# Altium PCB DZ_V5.1.PcbDoc (part 2 of 2)
Units mm, origin at the board's own origin, x right, y up, seen from the top; angles counter-clockwise.
Board outline 105.4 x 126 mm, 4 copper layers (Top Layer, TOP, Mid-Layer 1, INT1, Mid-Layer 2, INT2, Bottom Layer, Bottom); 225 components, 158 nets, 762 pads, 182 vias.
Unrouted connection lines stored in the file: 2.
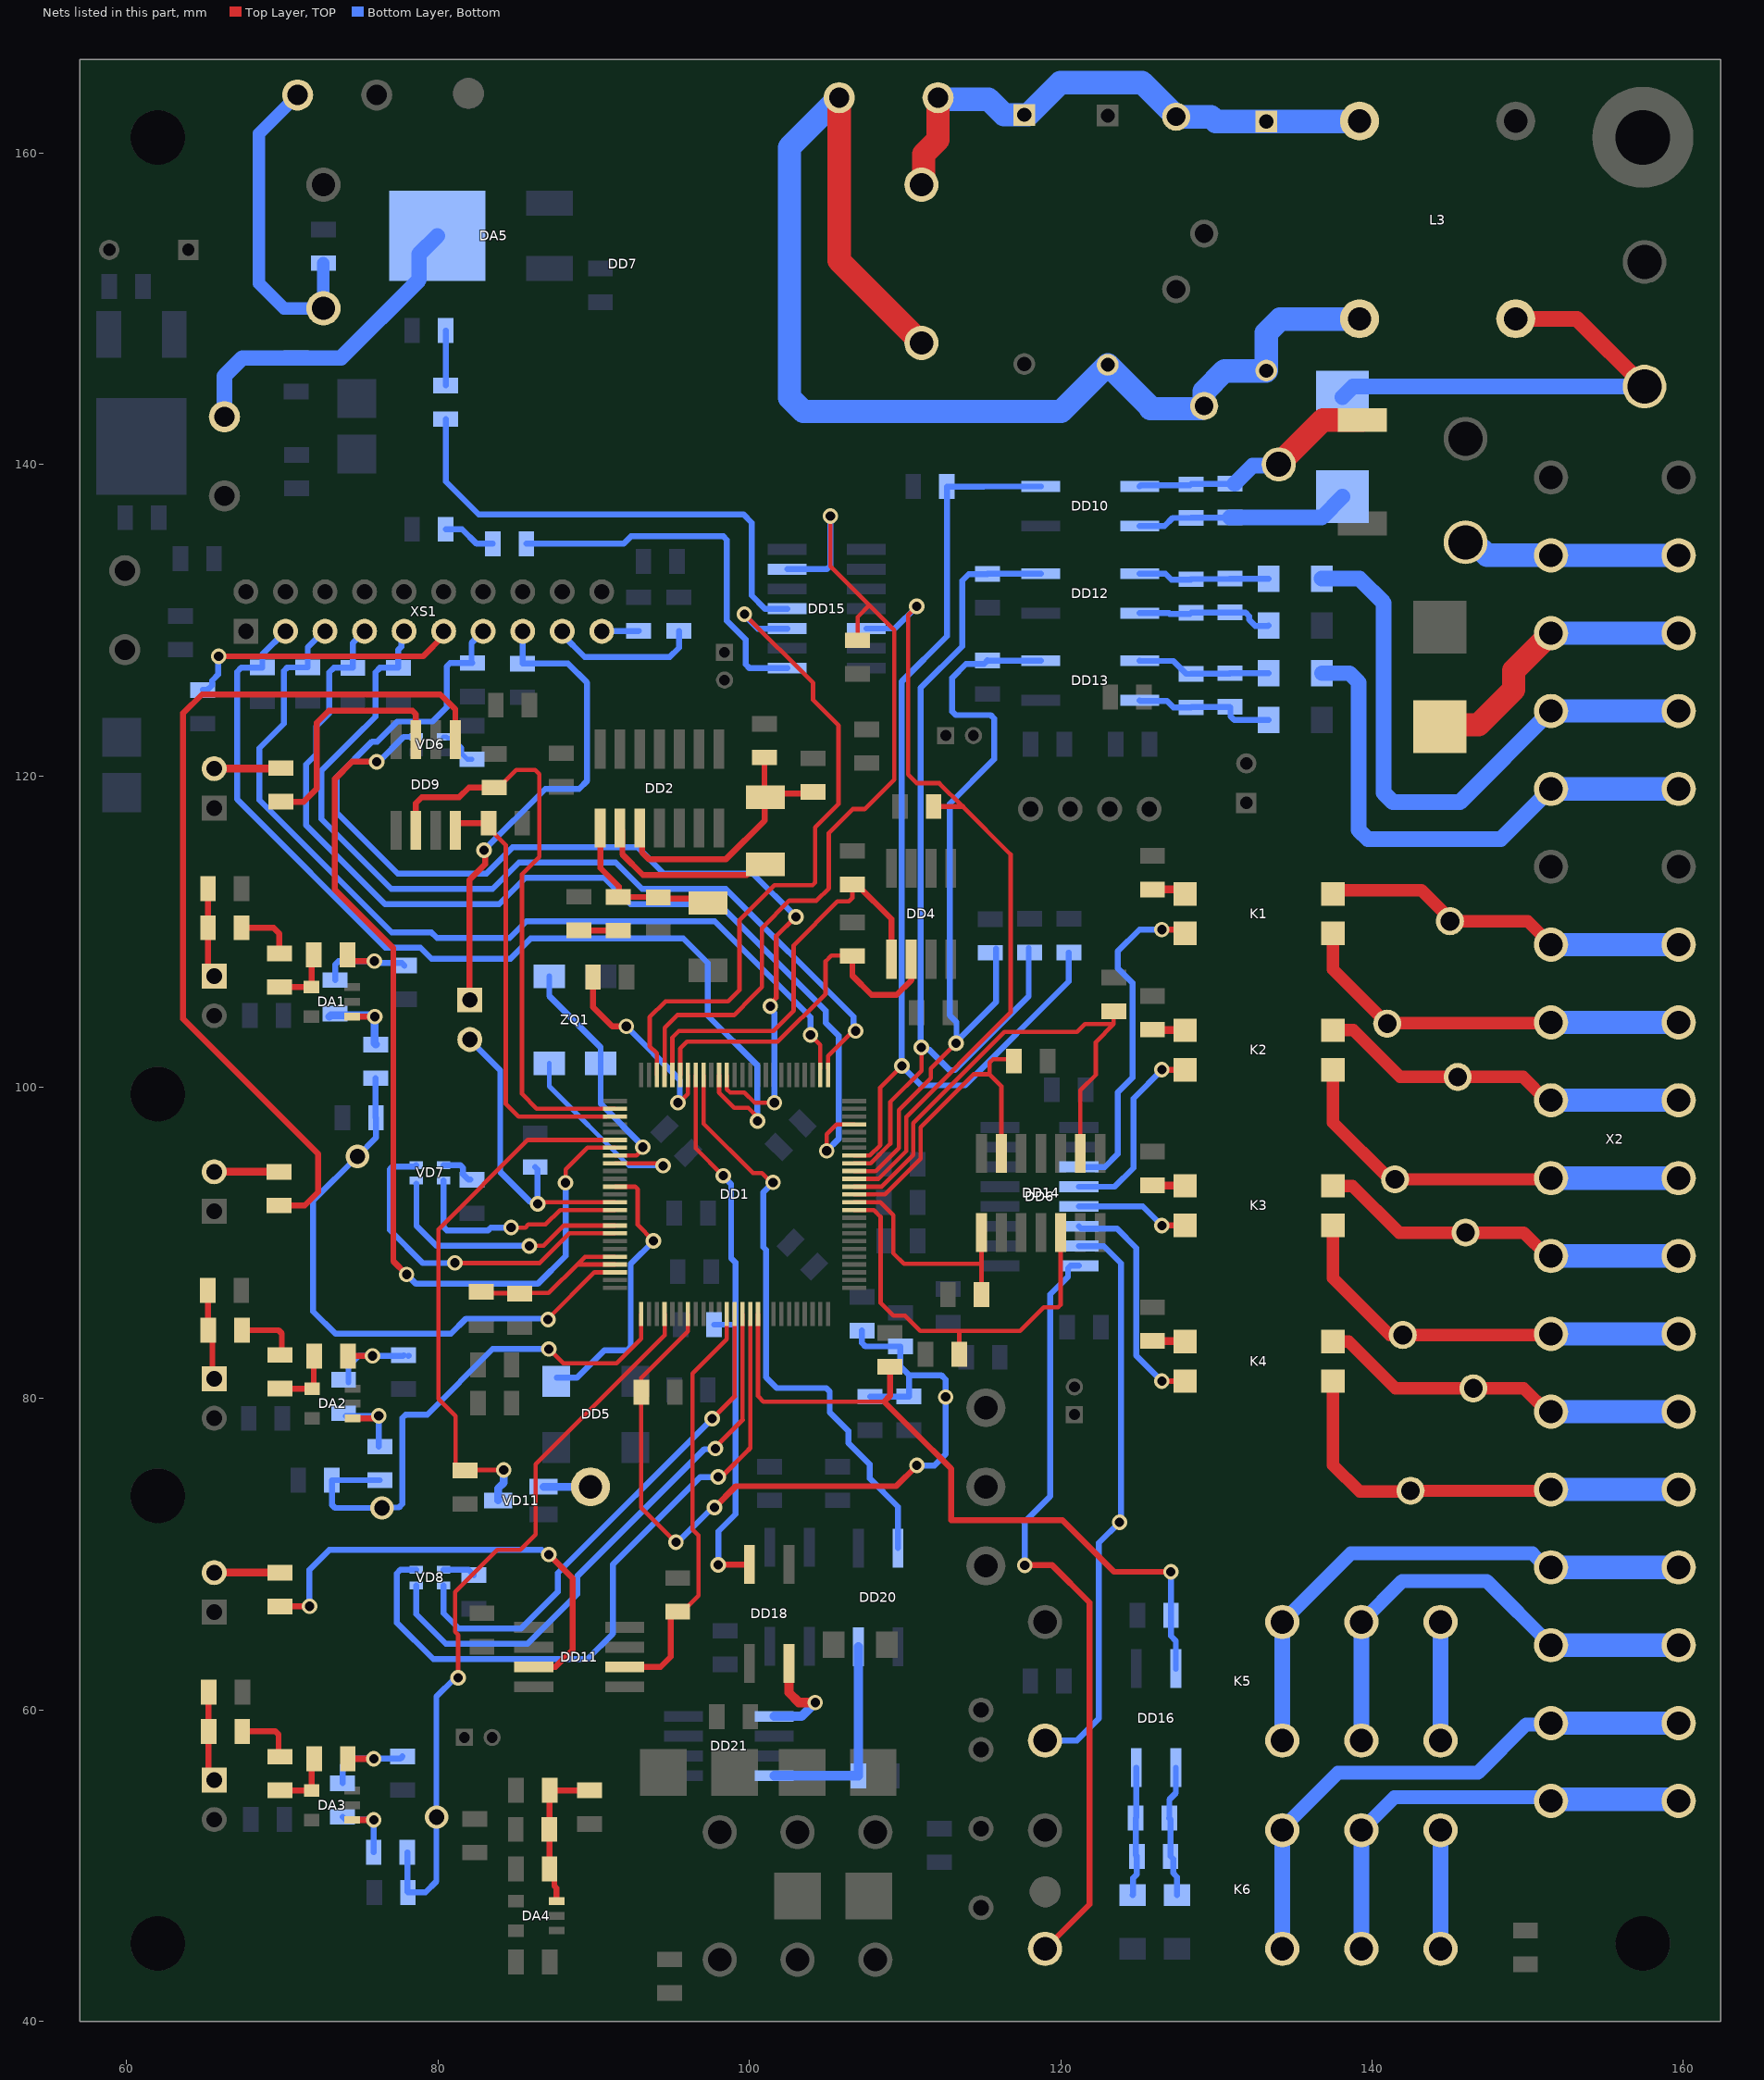
[diagram p4: the nets of this part, all layers, seen from the top]

## Via types
v1: diameter 1, hole 0.6, Top Layer, TOP to Bottom Layer, Bottom, tented both sides, 172 vias
v2: diameter 1.5, hole 1, Top Layer, TOP to Bottom Layer, Bottom, tented both sides, 7 vias
v3: diameter 1.6, hole 1, Top Layer, TOP to Bottom Layer, Bottom, 2 vias
v4: diameter 1.1, hole 0.7, Top Layer, TOP to Bottom Layer, Bottom, tented both sides, 1 vias

## Nets (pads, with @x,y where several pads share a name; then routed paths per layer and width w, separated by ;. In a path a pad name is that pad's centre, name@x,y a point inside that pad or via, vN(x,y) a via of type N, cw(c..) or ccw(c..) an arc to the next point about the centre after c; other vN are vias at no path point) (continued)
LED1.3: DD1.7 VD6.3 | length 60.6
  Top Layer, TOP w0.279: v1@88.202,93.859 88.202,94.721 89.506,96.025 89.592,96.111 DD1.7@91.37,96.111
  Top Layer, TOP w0.381: v1(76.053,120.898) 74.473,120.898 73.375,119.8 73.375,112.673 77.125,108.923 77.125,88.825 v1(77.975,87.975)
  Bottom Layer, Bottom w0.381: v1(76.053,120.898) 76.179,120.898 77.781,122.5 VD6.3@78.6,122.5 ; v1(77.975,87.975) 78.582,87.368 86.399,87.368 88.19,89.159 v1(88.19,93.859)
LED2.1: DD1.15 VD7.1 | length 14.6
  Top Layer, TOP w0.279: v1(84.69,90.984) 85.609,90.984 85.8,91.175 86.9,91.175 87.836,92.111 DD1.15@91.37,92.111
  Bottom Layer, Bottom w0.381: VD7.1@80.35,94 80.35,91.023 80.564,90.809 83.215,90.809 83.386,90.981 84.686,90.981 v1(84.69,90.984)
LED2.2: DD1.17 VD7.2 | length 16.5
  Top Layer, TOP w0.279: v1(85.865,89.809) 85.871,89.815 86.784,89.815 88.08,91.111 DD1.17@91.37,91.111
  Bottom Layer, Bottom w0.381: VD7.2@78.6,93.8 78.613,93.787 78.613,91.087 79.891,89.809 v1(85.865,89.809)
LED2.3: DD1.18 VD7.3 | length 21.9
  Top Layer, TOP w0.279: v1(81.073,88.718) 81.115,88.718 81.129,88.704 86.529,88.704 88.436,90.611 DD1.18@91.37,90.611
  Bottom Layer, Bottom w0.381: VD7.3@78.6,95 78.511,94.911 77.079,94.911 76.9,94.732 76.9,90.825 79.021,88.704 81.059,88.704 v1(81.073,88.718)
LED3.1: DD1.38 VD8.1 | length 32.6
  Top Layer, TOP w0.28: 99.05,80.144 DD1.38@99.05,85.006
  Top Layer, TOP w0.305: v1(97.615,78.709) 98.952,80.046 99.05,80.144
  Bottom Layer, Bottom w0.381: VD8.1@80.35,68 80.35,66.213 81.339,65.224 85.331,65.224 87.7,67.593 87.7,68.794 v1(97.615,78.709)
LED3.2: DD1.39 VD8.2 | length 37.1
  Top Layer, TOP w0.28: 99.55,78.619 DD1.39@99.55,85.431
  Top Layer, TOP w0.305: v1(97.819,76.792) 97.819,76.889 99.46,78.529 99.55,78.619
  Bottom Layer, Bottom w0.381: VD8.2@78.6,68 78.6,66.148 80.505,64.243 85.743,64.243 88.929,67.429 88.929,68.579 97.104,76.754 97.781,76.754 v1(97.819,76.792)
LED3.3: DD1.40 VD8.3 | length 44.6
  Top Layer, TOP w0.28: 100.05,76.819 DD1.40@100.05,85.006
  Top Layer, TOP w0.305: v1(97.985,74.97) 98.201,74.97 99.968,76.737 100.05,76.819
  Bottom Layer, Bottom w0.381: VD8.3@78.6,69 77.573,69 77.35,68.777 77.35,65.6 79.688,63.262 89.593,63.262 91.225,64.894 91.225,69.35 96.834,74.959 97.973,74.959 v1(97.985,74.97)
LED4: DD1.98 DD15.3 | length 44.3
  Top Layer, TOP w0.279: DD1.98@94.05,100.791 94.05,102.177 93.59,102.637 93.59,104.49 94.609,105.509 98.64,105.509 99.358,106.227 99.358,110.726 101.606,112.975 104.057,112.975 104.221,113.139 104.221,116.689 105.725,118.194 105.725,123.223 104.09,124.859 104.09,125.96 v1(99.675,130.375)
  Bottom Layer, Bottom w0.381: v1(99.675,130.375) 99.675,130.3 100.525,129.45 102.426,129.45 DD15.3@102.435,129.459
LED5: DD1.97 DD15.6 R90.1 | length 55.9
  Top Layer, TOP w0.279: DD1.97@94.55,100.791 94.55,103.819 94.908,104.177 95.36,104.629 99.004,104.629 100.237,105.863 100.237,105.872 100.8,106.435 100.8,110.218 102.563,111.981 104.307,111.981 105.1,112.774 105.1,116.325 106.634,117.859 107.395,117.859 109.298,119.761 109.298,129.351 107.699,130.949 ; v1(105.2,136.675) 105.2,133.448 107.699,130.949 ; R90.1@106.95,128.7 106.95,130.2 107.699,130.949
  Bottom Layer, Bottom w0.381: DD15.6@102.435,133.269 104.977,133.269 105.2,133.492 v1(105.2,136.675)
Led5_1: DD15.4 R82.1 | length 32.1
  Bottom Layer, Bottom w0.381: R82.1@80.49,142.909 80.49,138.901 82.616,136.775 99.625,136.775 100.15,136.25 100.15,131.575 100.996,130.729 DD15.4@102.435,130.729
LED_4_1_1: R81.1 VD9.1 | length 3.4
  Bottom Layer, Bottom w0.381: VD9.1@80.489,135.832 81.543,135.832 82.475,134.9 R81.1@83.516,134.9
LED_5_1_1: R82.2 VD10.1 | length 3.5
  Bottom Layer, Bottom w0.381: R82.2@80.489,145.068 VD10.1@80.489,148.6
NetBAT1_Plus: 
NetC1_1: R5.2 R6.1 | length 3.9
  Top Layer, TOP w0.381: R5.2@67.35,110.268 R5.2@67.379,110.239 69.43,110.239 69.8,109.869 R6.1@69.8,108.589
NetC3_2: C3.2 DD1.23 R7.2 | length 38.4
  Top Layer, TOP w0.279: v1(87.065,85.075) 87.065,85.134 90.042,88.111 DD1.23@91.37,88.111
  Bottom Layer, Bottom w0.381: R7.2@75.99,100.575 75.99,98.059 C3.2@76.015,98.034 76.015,96.759 74.815,95.56 71.975,92.719 71.975,85.598 73.409,84.165 80.82,84.165 81.789,85.134 87.006,85.134 v1(87.065,85.075)
  other v2: 74.825,95.55
NetC4_1: R12.2 R13.1 | length 4
  Top Layer, TOP w0.381: R12.2@67.4,84.389 69.75,84.389 69.96,84.179 R13.1@69.96,82.798
NetC6_2: C6.2 DD1.26 R14.2 | length 34.7
  Top Layer, TOP w0.279: v1(87.115,83.184) 88.04,82.259 91.459,82.259 93.05,83.85 DD1.26@93.05,85.431
  Bottom Layer, Bottom w0.381: R14.2@76.265,74.759 73.184,74.759 C6.2@73.175,74.75 73.175,73.181 73.381,72.975 v2(76.4,72.975) 76.43,73.005 77.477,73.005 77.7,73.228 77.7,78.752 77.923,78.975 79.3,78.975 83.509,83.184 v1(87.115,83.184)
NetC7_1: R19.2 R20.1 | length 3.8
  Top Layer, TOP w0.381: R19.2@67.764,58.629 69.545,58.629 69.754,58.42 R20.1@69.754,56.684
NetC9_2: C9.2 DD1.29 R21.2 | length 48.4
  Top Layer, TOP w0.279: v1(81.291,62.059) 81.291,64.816 81.09,65.017 81.09,67.578 83.795,70.284 85.29,70.284 86.265,71.259 86.265,75.783 94.55,84.068 DD1.29@94.55,85.431
  Bottom Layer, Bottom w0.381: R21.2@78.024,50.859 78.024,48.325 C9.2@78.065,48.284 79.185,48.284 79.89,48.988 79.89,53.125 79.89,60.859 81.09,62.059 v1(81.291,62.059)
  other v2: 79.9,53.125
NetC11_1: C11.1 C13.2 DA4.3 R22.2 R23.2 | length 9.9
  Top Layer, TOP w0.381: DA4.3@87.61,47.734 87.61,48.555 87.469,48.696 87.469,49.484 R23.2@87.16,49.794 87.154,49.799 87.154,52.328 C11.1@87.149,52.334 87.159,52.344 87.159,54.823 R22.2@87.17,54.834 C13.2@89.74,54.834
NetC16_1: C16.1 DD2.1 R26.2 VD5.1 | length 11.6
  Top Layer, TOP w0.381: DD2.1@90.411,116.634 90.425,116.62 90.425,114.073 91.614,112.884 91.614,112.266 C16.1@91.566,112.218 94.116,112.218 R26.2@94.141,112.193 94.232,112.102 VD5.1@98.165,112.102
NetC16_2: C16.2 R25.2 | length 2.5
  Top Layer, TOP w0.381: R25.2@89.039,110.075 89.055,110.059 C16.2@91.566,110.059
NetC17_2: C17.2 DD2.3 R24.1 VD4.2 | length 18
  Top Layer, TOP w0.381: DD2.3@92.951,116.634 93.111,116.474 93.111,115.072 93.533,114.65 98.5,114.65 100.975,117.125 100.975,118.587 VD4.2@101.014,118.627 ; VD4.2@100.964,118.677 R24.1@100.964,121.175 ; VD4.2@100.989,118.627 100.989,118.827 101.014,118.852 C17.2@104.047,118.852
NetC20_1: 
NetC26_2: C26.2 DD1.6 VD11.3 | length 34.7
  Top Layer, TOP w0.279: v1(84.215,75.409) 81.756,75.409 C26.2@81.74,75.393 81.485,75.393 81.125,75.753 81.125,78.875 80.025,79.975 80.025,90.869 85.767,96.611 DD1.6@91.37,96.611
  Bottom Layer, Bottom w0.5: VD11.3@83.85,73.45 83.85,74.225 84.215,74.59 v1(84.215,75.409)
NetC30_2: C30.2 DD1.21 DD1.22 R44.2 | length 12.3
  Top Layer, TOP w0.279: C30.2@82.465,86.734 82.499,86.768 84.939,86.768 84.965,86.743 84.999,86.777 87.102,86.777 88.962,88.638 ; DD1.22@91.37,88.611 88.989,88.611 88.962,88.638 ; DD1.21@91.37,89.111 89.436,89.111 88.962,88.638
NetC34_2: C34.2 DA5.Vout L1.1 | length 21
  Bottom Layer, Bottom w1: L1.1@66.275,143.055 66.275,145.675 67.434,146.834 C34.2@70.875,146.834 73.759,146.834 78.775,151.85 78.775,153.5 DA5.Vout@79.95,154.675
NetC37_2: C37.2 DD7.Vcc L2.1 | length 20.8
  Bottom Layer, Bottom w0.8: L2.1@70.975,163.725 68.5,161.25 68.5,151.625 70.102,150.023 DD7.Vcc@72.632,150.023 72.629,150.026 72.629,152.921 C37.2@72.625,152.925
NetC45_1: C45.1 DD10.2 R59.2 R101.2 | length 13.9
  Bottom Layer, Bottom w0.381: DD10.2@125.064,136.044 126.669,136.044 127.184,136.559 C45.1@128.364,136.559 128.385,136.579 130.844,136.579 R59.2@130.873,136.55 ; R59.2@130.864,136.6 R59.2@130.889,136.575
  Bottom Layer, Bottom w1: R59.2@130.864,136.6 136.775,136.6 R101.2@138.1,137.925
NetC45_2: C45.2 DD10.1 pad.7@134,140 R59.1 VD15.Catod | length 16.1
  Top Layer, TOP w1.5: pad.7@134,140 136.85,142.85 VD15.Catod@139.375,142.85
  Bottom Layer, Bottom w0.381: DD10.1@125.064,138.584 125.131,138.651 128.297,138.651 C45.2@128.364,138.718 128.385,138.738 130.844,138.738 R59.1@130.864,138.759 R59.1@131.164,138.759 ; pad.7@133.923,139.923 pad.7@134,140
  Bottom Layer, Bottom w1: R59.1@131.164,138.759 132.329,139.923 pad.7@133.923,139.923
NetC46_2: C46.1 DD1.68 DD10.3 R56.2 | length 67.9
  Top Layer, TOP w0.279: DD1.68@106.73,95.611 107.736,95.611 108.4,96.275 108.4,99.969 v1(109.79,101.359)
  Bottom Layer, Bottom w0.381: DD10.3@118.714,138.584 115.059,138.584 115.05,138.575 C46.1@112.684,138.575 112.684,128.959 109.79,126.065 v1(109.79,101.359) 111.029,100.119 113.852,100.119 120.515,106.782 R56.2@120.515,108.65
NetC47_1: C47.1 DD12.2 R65.2 R66.2 | length 8.8
  Bottom Layer, Bottom w0.381: DD12.2@125.064,130.444 126.956,130.444 127,130.4 128.306,130.4 C47.1@128.364,130.459 128.385,130.479 130.844,130.479 130.848,130.475 131.877,130.475 132.1,130.252 132.1,130.025 132.5,129.625 133.306,129.625 R66.2@133.339,129.659
NetC47_2: C47.2 DD12.1 R64.2 R65.1 | length 8.5
  Bottom Layer, Bottom w0.381: DD12.1@125.064,132.984 126.716,132.984 126.875,132.825 127.1,132.6 128.347,132.6 C47.2@128.364,132.618 128.385,132.638 130.844,132.638 R65.1@130.864,132.659 R64.2@133.339,132.659
NetC50_2: C50.1 DD1.67 DD12.3 R63.2 | length 58.7
  Top Layer, TOP w0.279: DD1.67@106.73,95.111 107.786,95.111 109.05,96.375 109.05,99.05 111.05,101.05 v1(111.05,102.55)
  Bottom Layer, Bottom w0.381: R63.2@117.94,108.925 117.94,105.84 113.2,101.1 112.85,101.1 111.518,102.432 111.168,102.432 v1(111.05,102.55) 111,102.6 111,125.65 113.665,128.315 113.665,132.54 114.084,132.959 C50.1@115.29,132.959 115.302,132.971 118.702,132.971 DD12.3@118.714,132.984
NetC51_1: C51.1 DD13.2 R69.2 R70.2 | length 9.2
  Bottom Layer, Bottom w0.381: DD13.2@125.064,124.844 125.108,124.8 126.825,124.8 127.225,124.4 128.348,124.4 C51.1@128.364,124.384 128.405,124.425 R69.2@130.864,124.425 130.9,124.389 130.9,123.825 131.141,123.584 R70.2@133.339,123.584
NetC51_2: C51.2 DD13.1 R68.2 R69.1 | length 8.6
  Bottom Layer, Bottom w0.381: DD13.1@125.064,127.384 125.073,127.375 127.232,127.375 128.064,126.543 C51.2@128.364,126.543 128.385,126.563 130.844,126.563 R69.1@130.864,126.584 R68.2@133.339,126.584
NetC52_2: C52.1 DD1.66 DD13.3 R67.2 | length 52.5
  Top Layer, TOP w0.279: DD1.66@106.73,94.611 108.111,94.611 109.6,96.1 109.6,98.53 111.65,100.58 111.65,101.197 v1(113.278,102.825) v1@113.278,102.75 ; v1@113.303,102.775 v1@113.531,102.775
  Bottom Layer, Bottom w0.3: v1(113.278,102.825) 113.278,102.903 v1@113.303,102.928
  Bottom Layer, Bottom w0.381: R67.2@115.84,108.9 115.84,105.465 113.303,102.928 113.303,104.171 112.865,104.609 112.865,118.209 115.725,121.069 115.725,123.677 115.502,123.9 113.253,123.9 113.03,124.123 113.03,126.293 113.918,127.181 115.061,127.181 C52.1@115.29,127.409 115.302,127.396 118.702,127.396 DD13.3@118.714,127.384
NetC54_2: R76.1 X3.1 XS1.15 | length 31.6
  Top Layer, TOP w0.381: X3.1@82.015,105.599 82.015,113.315 83.015,114.315 83.015,115.162 v1(82.954,115.223)
  Bottom Layer, Bottom w0.381: v1(82.954,115.223) 86.881,119.15 89.05,119.15 89.575,119.675 89.575,125.975 88.35,127.2 R76.1@85.425,127.2 85.435,127.21 XS1.15@85.435,129.281
NetDA1_1: DA1.1 R1.2 R7.1 | length 6.3
  Top Layer, TOP w0.3: DA1.1@74.47,104.539 DA1.1@74.48,104.529
  Top Layer, TOP w0.381: DA1.1@74.48,104.529 74.485,104.534 75.921,104.534 v1(75.926,104.529)
  Bottom Layer, Bottom w0.5: R1.2@73.015,104.529 73.11,104.624 75.831,104.624 v1(75.926,104.529) ; R7.1@75.99,102.734 R7.1@76,102.744
  Bottom Layer, Bottom w0.508: v1(75.926,104.529) 75.926,102.817 R7.1@76,102.744
NetDA1_4: DA1.4 R4.1 R6.2 | length 4.1
  Top Layer, TOP w0.381: R6.2@69.83,106.43 69.839,106.439 DA1.4@71.87,106.439 R4.1@71.87,108.509
NetDA2_1: DA2.1 R8.2 R14.1 | length 5.8
  Top Layer, TOP w0.381: DA2.1@74.51,78.729 75.857,78.729 76.025,78.896 v1(76.187,78.896)
  Bottom Layer, Bottom w0.381: R8.2@74.085,78.884 76.19,78.884 R14.1@76.19,76.918
NetDA2_4: DA2.4 R11.1 R13.2 | length 4.2
  Top Layer, TOP w0.381: R13.2@69.96,80.629 R13.2@69.97,80.629 ; R13.2@69.96,80.639 R13.2@69.97,80.629 ; R11.1@72.01,82.719 72.01,80.629 R13.2@69.97,80.629
NetDA3_1: DA3.1 R15.2 R21.1 | length 5.6
  Top Layer, TOP w0.4: DA3.1@74.475,52.939 v1@75.855,52.939
  Top Layer, TOP w0.5: v1@75.855,52.939 v1(75.865,52.949)
  Bottom Layer, Bottom w0.381: R15.2@73.865,53.134 74.05,52.949 v1(75.865,52.949) R21.1@75.865,50.859
NetDA3_4: DA3.4 R18.1 R20.2 | length 4.1
  Top Layer, TOP w0.381: R20.2@69.835,54.839 DA3.4@71.875,54.839 R18.1@71.875,56.869
NetDD1_2: DD1.2 DD9.2 R54.2 | length 38.1
  Top Layer, TOP w0.279: R54.2@83.6,119.25 83.9,119.25 85.025,120.375 86.225,120.375 86.5,120.1 86.5,114.794 85.39,113.684 85.39,99.559 86.337,98.611 DD1.2@91.37,98.611
  Top Layer, TOP w0.381: DD9.2@78.569,116.492 78.569,118.239 78.956,118.625 81.35,118.625 81.975,119.25 R54.2@83.6,119.25
NetDD1_3: DD1.3 DD9.4 R58.2 | length 27.8
  Top Layer, TOP w0.279: R58.2@83.24,116.959 83.24,116.659 84.344,115.554 84.344,98.933 85.16,98.118 DD1.3@90.824,98.118
  Top Layer, TOP w0.381: DD9.4@81.109,116.492 81.109,116.761 81.307,116.959 R58.2@83.24,116.959
NetDD1_14: C14.2 DD1.14 X3.2 | length 20
  Top Layer, TOP w0.279: v1(86.39,92.509) 86.492,92.611 DD1.14@91.37,92.611
  Bottom Layer, Bottom w0.381: X3.2@82.015,103.059 83.99,101.084 83.99,94.56 85.923,92.627 86.271,92.627 v1(86.39,92.509) 86.39,94.712 C14.2@86.233,94.869
NetDD1_37: DD1.37 DD11.2 R62.2 | length 26.9
  Top Layer, TOP w0.279: R62.2@95.39,66.316 95.69,66.316 96.729,67.356 96.729,71.221 96.35,71.6 96.35,81.619 96.59,81.859 98.444,83.713 98.55,83.819 DD1.37@98.55,85.006
  Top Layer, TOP w0.381: DD11.2@91.99,62.764 94.289,62.764 94.944,63.419 94.944,66.007 95.254,66.316 R62.2@95.39,66.316
NetDD1_61: DD1.61 DD14.12 R34.1 | length 26.6
  Top Layer, TOP w0.279: DD1.61@106.73,92.111 107.989,92.111 108.425,91.675 108.425,86.15 109.25,85.325 110,85.325 110.971,84.354 113.525,84.354 ; R34.1@113.475,82.85 113.475,84.304 113.525,84.354 ; DD14.12@119.99,90.659 119.99,86.025 119.826,85.862 118.903,85.862 117.395,84.354 113.525,84.354
NetDD1_62: DD1.62 DD14.8 R33.1 | length 15.2
  Top Layer, TOP w0.279: DD1.62@106.73,92.611 108.414,92.611 109.25,91.775 109.25,89.325 109.925,88.65 114.909,88.65 ; R33.1@114.909,86.675 114.909,88.65 ; DD14.8@114.91,90.659 114.91,89.035 114.909,88.65
NetDD1_63: DD1.63 DD14.6 R89.2 | length 20.9
  Top Layer, TOP w0.279: DD1.63@106.73,93.111 108.661,93.111 ; 108.701,93.111 111,95.41 111,97.425 114.4,100.825 115.425,100.825 ; DD14.6@116.18,95.739 116.18,100.07 115.425,100.825 ; R89.2@116.991,101.675 116.866,101.8 115.65,101.8 115.425,101.575 115.425,100.825
NetDD1_64: DD1.64 DD14.2 R88.2 | length 32.2
  Top Layer, TOP w0.279: DD1.64@106.73,93.611 108.487,93.611 110.525,95.649 110.525,97.7 116.375,103.55 121.05,103.55 121.55,104.05 123.4,104.05 ; DD14.2@121.26,95.739 121.26,99.81 122.25,100.8 122.25,102.9 123.4,104.05 ; R88.2@123.4,104.875 123.4,104.05
NetDD1_65: DD1.65 DD15.12 R41.1 | length 51.3
  Top Layer, TOP w0.279: DD1.65@106.73,94.111 108.29,94.111 110.075,95.896 110.075,98.093 116.775,104.793 116.775,114.95 113.7,118.025 112.2,119.525 110.75,119.525 110.2,120.075 110.2,130.325 v1(110.75,130.875)
  Top Layer, TOP w0.305: R41.1@111.825,118.025 113.7,118.025
  Bottom Layer, Bottom w0.254: DD15.12@107.515,129.459 DD15.12@107.519,129.454
  Bottom Layer, Bottom w0.381: DD15.12@107.519,129.454 109.329,129.454 v1(110.75,130.875)
NetDD1_72: DD1.72 R72.1 XS1.7 | length 67.1
  Top Layer, TOP w0.279: v1(104.965,95.909) 104.965,96.975 105.6,97.611 DD1.72@106.73,97.611
  Bottom Layer, Bottom w0.381: R72.1@74.425,126.934 73.298,126.934 73.015,126.651 73.015,124.015 72.171,123.171 72.171,121.384 71.525,120.737 71.525,116.825 76.587,111.763 83.915,111.763 85.602,113.45 90.675,113.45 92.362,111.763 98.049,111.763 104.906,104.906 104.906,104.131 105.725,103.312 105.725,96.669 v1(104.965,95.909) ; R72.1@74.525,126.934 74.525,128.531 XS1.7@75.275,129.281
NetDD1_76: DD1.76 R71.1 XS1.9 | length 60
  Top Layer, TOP w0.279: DD1.76@105.048,101.166 105.048,101.992 106.665,103.609 v1(106.816,103.609)
  Bottom Layer, Bottom w0.381: XS1.9@77.815,129.281 77.634,129.1 77.634,128.284 77.44,128.09 R71.1@77.44,126.934 76.259,126.934 75.975,126.65 75.975,123.8 74.594,122.419 72.506,120.331 72.506,117.232 76.994,112.744 83.509,112.744 85.196,114.431 91.415,114.431 93.102,112.744 98.471,112.744 106.688,104.528 106.688,103.737 v1(106.816,103.609)
NetDD1_77: DD1.77 R73.1 XS1.5 | length 59
  Top Layer, TOP w0.279: v1(103.925,103.35) 104.55,102.725 DD1.77@104.55,101.172
  Bottom Layer, Bottom w0.381: XS1.5@72.735,129.281 72.656,129.281 71.625,128.25 R73.1@71.625,126.959 70.314,126.959 70.09,126.736 70.09,123.34 68.525,121.775 68.525,118.438 77.019,109.944 79.566,109.944 79.928,109.581 84.594,109.581 85.663,110.65 97.775,110.65 103.925,104.5 v1(103.925,103.35)
NetDD1_89: DD1.89 R78.2 XS1.13 | length 68.7
  Top Layer, TOP w0.279: DD1.89@98.55,100.791 98.55,99.876 98.765,99.661 99.68,99.661 100.341,99 v1(101.605,99)
  Top Layer, TOP w0.305: v1(101.34,105.209) 101.34,105.35 101.725,105.735 101.725,109.7 102.967,110.942 v1(102.993,110.942)
  Bottom Layer, Bottom w0.381: XS1.13@82.895,129.281 82.15,128.536 82.15,127.298 R78.2@82.204,127.244 80.773,127.244 80.55,127.021 80.55,124.4 79.631,123.481 77.375,123.481 76.093,122.199 75.761,122.199 73.487,119.925 73.487,117.638 77.4,113.725 83.103,113.725 84.79,115.412 92.821,115.412 94.508,113.725 100.21,113.725 v1(102.993,110.942) ; v1(101.34,105.209) 101.34,105.041 101.605,104.776 v1(101.605,99)
NetDD1_90: DD1.90 R74.1 XS1.3 | length 64.5
  Top Layer, TOP w0.279: DD1.90@98.05,100.791 98.05,99.65 99.026,98.674 99.924,98.674 100.515,98.084 v1(100.515,97.834)
  Bottom Layer, Bottom w0.381: XS1.3@70.195,129.281 68.712,127.798 68.712,126.962 R74.1@68.7,126.95 67.348,126.95 67.084,126.686 67.084,118.491 76.613,108.963 78.863,108.963 79.575,108.25 84.65,108.25 85.95,109.55 95.75,109.55 97.325,107.975 97.325,104.583 100.515,101.393 v1(100.515,97.834)
NetDD1_94: DD1.94 R35.2 | length 13.1
  Top Layer, TOP w0.279: v1@95.444,98.956 96.05,99.561 DD1.94@96.05,100.791
  Top Layer, TOP w0.381: R35.2@89.955,107.084 89.955,105.143 91.19,103.909 v1(92.09,103.909)
  Bottom Layer, Bottom w0.381: v1(92.09,103.909) 95.525,100.473 v1@95.525,98.925
  other v1: 95.4,99
NetDD2_2: DD2.2 VD4.1 | length 11.8
  Top Layer, TOP w0.381: DD2.2@91.681,116.634 91.841,116.474 91.841,114.955 93.171,113.625 99.831,113.625 100.514,114.309 VD4.1@101.014,114.309
NetDD7_LINE: C62.1 C64.1 DD7.LINE L3.1 R85.1 R99.2 | length 35.5
  Top Layer, TOP w1.5: DD7.LINE@111.05,157.96 111.184,158.094 111.184,159.923 112.114,160.852 R85.1@112.114,163.55
  Bottom Layer, Bottom w1.5: R85.1@112.114,163.55 112.209,163.454 115.345,163.454 116.349,162.45 117.905,162.45 119.978,164.523 125.214,164.523 R99.2@127.412,162.325 129.65,162.325 129.95,162.025 C62.1@133.206,162.025 139.167,162.025 L3.1@139.192,162.05
NetDD7_NEUTRAL: C62.2 C63.2 DD7.NEUTRAL L3.2 R85.2 R86.1 | length 82.5
  Top Layer, TOP w1.5: 105.764,153.086 R85.2@105.764,163.55 ; 105.788,153.063 DD7.NEUTRAL@111.05,147.8
  Bottom Layer, Bottom w1.5: R85.2@105.764,163.55 102.575,160.361 102.575,144.279 103.454,143.4 120.019,143.4 C63.2@123.017,146.398 125.75,143.665 125.75,143.575 129.037,143.575 R86.1@129.212,143.75 129.212,144.687 130.525,146 133.183,146 C62.2@133.206,146.023 133.206,148.446 134.085,149.325 139.167,149.325 L3.2@139.192,149.35 ; DD7.NEUTRAL@111.05,147.8 DD7.NEUTRAL@111.184,147.666
NetDD9_5: DD9.5 R53.1 | length 57.5
  Top Layer, TOP w0.381: R53.1@69.79,92.4 71.431,92.4 72.29,93.259 72.29,95.719 63.625,104.384 63.625,124.027 64.823,125.225 80.148,125.225 81.09,124.284 81.109,124.264 DD9.5@81.109,122.334
NetDD9_7: DD9.7 R55.1 | length 15.3
  Top Layer, TOP w0.381: R55.1@69.89,118.334 71.365,118.334 72.2,119.169 72.2,123.4 72.977,124.177 78.346,124.177 78.569,123.954 DD9.7@78.569,122.334
NetDD11_7: DD11.7 R61.1 | length 30
  Top Layer, TOP w0.381: R61.1@69.85,66.659 v1(71.74,66.659) ; DD11.7@86.148,62.764 87.533,62.764 88.64,63.87 88.64,68.459 v1(87.115,69.984)
  Bottom Layer, Bottom w0.381: v1(71.74,66.659) 71.74,69.009 73.006,70.275 86.656,70.275 86.947,69.984 v1(87.115,69.984)
NetDD15_3: DD15.1 R81.2 | length 24.4
  Bottom Layer, Bottom w0.381: R81.2@85.675,134.9 91.918,134.9 92.393,135.375 98.327,135.375 98.55,135.152 98.55,129.958 99.76,128.747 99.76,127.148 99.984,126.925 102.428,126.925 DD15.1@102.435,126.919
NetK1_1: K1.1 R45.2 | length 2.1
  Top Layer, TOP w0.3: K1.1@127.949,112.7 K1.1@127.99,112.659
  Top Layer, TOP w0.508: R45.2@125.89,112.7 K1.1@127.949,112.7
NetK1_3: K1.3 R46.2 X2.11 X2.29 | length 26.2
  Top Layer, TOP w0.3: R46.2@140.969,104.083 R46.2@141.008,104.121 ; X2.11@151.452,104.121 X2.11@151.49,104.159
  Top Layer, TOP w0.8: K1.3@137.49,110.119 137.49,107.563 R46.2@140.969,104.083 ; R46.2@141.008,104.121 X2.11@151.452,104.121
  Bottom Layer, Bottom w1.5: X2.11@151.49,104.159 X2.29@159.69,104.159
NetK1_4: K1.4 R46.1 X2.12 X2.30 | length 23.6
  Top Layer, TOP w0.8: K1.4@137.49,112.659 143.165,112.659 145.165,110.659 149.99,110.659 X2.12@151.49,109.159
  Bottom Layer, Bottom w1.5: X2.12@151.49,109.159 X2.30@159.69,109.159
NetK2_1: K2.1 R47.2 | length 2.1
  Top Layer, TOP w0.508: R47.2@125.91,103.679 K2.1@127.969,103.679
  Top Layer, TOP w0.8: R47.2@125.89,103.7 R47.2@125.91,103.679 ; K2.1@127.969,103.679 K2.1@127.99,103.659
NetK2_3: K2.3 R48.2 X2.9 X2.27 | length 27.1
  Top Layer, TOP w0.8: K2.3@137.49,101.119 137.49,97.727 141.134,94.083 X2.9@151.413,94.083
  Top Layer, TOP w1.5: X2.9@151.413,94.083 X2.9@151.49,94.159
  Bottom Layer, Bottom w1.5: X2.9@151.49,94.159 X2.27@159.69,94.159
NetK2_4: K2.4 R48.1 X2.10 X2.28 | length 24.1
  Top Layer, TOP w0.8: K2.4@137.49,103.659 138.79,103.659 141.79,100.659 145.165,100.659 149.69,100.659 151.19,99.159 X2.10@151.49,99.159
  Bottom Layer, Bottom w1.5: X2.10@151.49,99.159 X2.28@159.69,99.159
NetK3_1: K3.1 R49.2 | length 2.1
  Top Layer, TOP w0.508: R49.2@125.91,93.679 K3.1@127.969,93.679
  Top Layer, TOP w0.8: R49.2@125.89,93.7 R49.2@125.91,93.679 ; K3.1@127.969,93.679 K3.1@127.99,93.659
NetK3_3: K3.3 R50.2 X2.7 X2.25 | length 27.1
  Top Layer, TOP w0.8: K3.3@137.49,91.119 137.49,87.733 141.14,84.083 X2.7@151.413,84.083
  Top Layer, TOP w1.5: X2.7@151.413,84.083 X2.7@151.49,84.159
  Bottom Layer, Bottom w1.5: X2.7@151.49,84.159 X2.25@159.69,84.159
NetK3_4: K3.4 R50.1 X2.8 X2.26 | length 24.1
  Top Layer, TOP w0.8: K3.4@137.49,93.659 138.74,93.659 141.74,90.659 145.17,90.659 149.737,90.659 151.237,89.159 X2.8@151.49,89.159
  Bottom Layer, Bottom w1.5: X2.8@151.49,89.159 X2.26@159.69,89.159
NetK4_1: K4.1 R51.2 | length 2.1
  Top Layer, TOP w0.508: R51.2@125.91,83.679 K4.1@127.969,83.679
  Top Layer, TOP w0.8: R51.2@125.89,83.7 R51.2@125.91,83.679 ; K4.1@127.969,83.679 K4.1@127.99,83.659
NetK4_3: K4.3 R52.2 X2.5 X2.23 | length 28.4
  Top Layer, TOP w0.8: K4.3@137.49,81.119 137.49,75.734 139.198,74.025 142.412,74.025 R52.2@142.469,74.083 142.477,74.075 151.406,74.075 X2.5@151.49,74.159
  Bottom Layer, Bottom w1.5: X2.5@151.49,74.159 X2.23@159.69,74.159
NetK4_4: K4.4 R52.1 X2.6 X2.24 | length 24.1
  Top Layer, TOP w0.8: K4.4@137.49,83.659 138.49,83.659 141.49,80.659 144.99,80.659 149.737,80.659 151.237,79.159 X2.6@151.49,79.159
  Bottom Layer, Bottom w1.5: X2.6@151.49,79.159 X2.24@159.69,79.159
NetK5_3: K5.3 K5.6 X2.4 X2.22 | length 35.3
  Bottom Layer, Bottom w0.889: K5.3@134.23,65.654 138.626,70.05 150.304,70.05 X2.4@151.195,69.159
  Bottom Layer, Bottom w1: K5.6@134.23,58.034 K5.3@134.23,65.654 ; X2.4@151.195,69.159 X2.4@151.49,69.159
  Bottom Layer, Bottom w1.5: X2.4@151.49,69.159 X2.22@159.69,69.159
NetK5_4: K5.4 K5.7 X2.3 X2.21 | length 30.8
  Bottom Layer, Bottom w0.889: K5.7@139.31,65.654 141.931,68.275 147.373,68.275 X2.3@151.49,64.159
  Bottom Layer, Bottom w1: K5.4@139.31,58.034 K5.7@139.31,65.654
  Bottom Layer, Bottom w1.5: X2.3@151.49,64.159 X2.21@159.69,64.159
NetK5_5: K5.5 K5.8 | length 7.6
  Bottom Layer, Bottom w1: K5.8@144.39,58.034 K5.5@144.39,65.654
NetK6_3: K6.3 K6.6 X2.2 X2.20 | length 36
  Bottom Layer, Bottom w0.889: K6.3@134.23,52.399 137.806,55.975 146.8,55.975 149.898,59.073 X2.2@151.404,59.073
  Bottom Layer, Bottom w1: K6.6@134.23,44.659 K6.3@134.23,52.279 K6.3@134.23,52.399 ; X2.2@151.404,59.073 X2.2@151.49,59.159
  Bottom Layer, Bottom w1.499: X2.2@151.49,59.159 X2.20@159.69,59.159
NetK6_4: K6.4 K6.7 X2.1 X2.19 | length 29.1
  Bottom Layer, Bottom w0.889: K6.7@139.31,52.279 141.431,54.4 151.248,54.4 X2.1@151.49,54.159
  Bottom Layer, Bottom w1: K6.4@139.31,44.659 K6.7@139.31,52.279 ; X2.1@151.49,54.159 X2.1@151.591,54.26 ; X2.19@159.589,54.26 X2.19@159.69,54.159
  Bottom Layer, Bottom w1.499: X2.1@151.591,54.26 X2.19@159.589,54.26
NetK6_5: K6.5 K6.8 | length 7.6
  Bottom Layer, Bottom w1: K6.8@144.39,44.659 K6.5@144.39,52.279
NetOutSv1: C59.1 DD1.41 DD16.3 R32.1 | length 47.2
  Top Layer, TOP w0.28: DD1.41@100.55,85.431 100.55,80.15 100.9,79.8 108.65,79.8 ; 110.488,77.963 110.5,77.975
  Top Layer, TOP w0.381: R32.1@109.025,82.05 109.025,80.175 108.65,79.8 110.488,77.963 112.95,75.5 112.95,72.2 120.1,72.2 123.425,68.875 v1(127.075,68.875)
  Bottom Layer, Bottom w0.381: v1(127.075,68.875) C59.1@127.075,66.075 127.075,64.75 127.39,64.435 DD16.3@127.39,62.65
NetR1_1: R1.1 R3.2 R4.2 | length 7.5
  Top Layer, TOP w0.381: R4.2@74.189,108.499 74.588,108.1 v1(75.9,108.1)
  Bottom Layer, Bottom w0.381: R1.1@73.39,106.879 73.39,107.877 73.613,108.1 v1(75.9,108.1) 76.018,107.982 77.667,107.982 R3.2@77.84,107.809
NetR2_1: R2.1 R5.1 VD1.1 | length 5.8
  Top Layer, TOP w0.381: R2.1@65.216,112.75 65.216,110.243 R5.1@65.22,110.239 65.225,110.234 65.225,107.519 VD1.1@65.615,107.129
NetR8_1: R8.1 R10.2 R11.2 | length 6.5
  Top Layer, TOP w0.3: v1(75.795,82.739) v1@75.82,82.739
  Top Layer, TOP w0.381: R11.2@74.229,82.739 v1(75.795,82.739)
  Bottom Layer, Bottom w0.381: R8.1@74.24,81.05 74.24,82.079 74.9,82.739 v1(75.795,82.739) 77.745,82.739 R10.2@77.79,82.784 ; R10.2@78.095,82.739 R10.2@78.115,82.759
NetR9_1: R9.1 R12.1 VD2.1 | length 5.8
  Top Layer, TOP w0.381: R9.1@65.2,86.95 65.22,86.93 65.22,84.409 R12.1@65.241,84.389 65.5,84.129 65.5,81.393 VD2.1@65.615,81.279
NetR15_1: R15.1 R17.2 R18.2 | length 6.9
  Top Layer, TOP w0.4: R18.2@74.195,56.869 v1(75.865,56.869)
  Bottom Layer, Bottom w0.381: R15.1@73.865,55.293 73.865,56.434 74.3,56.869 v1(75.865,56.869) 77.566,56.869 R17.2@77.715,57.018
NetR16_1: R16.1 R19.1 VD3.1 | length 5.8
  Top Layer, TOP w0.381: R16.1@65.266,61.15 65.26,61.144 65.26,58.635 R19.1@65.255,58.629 65.255,55.859 VD3.1@65.615,55.499
NetR27_2: R27.2 VD6.4 | length 2.6
  Bottom Layer, Bottom w0.3: VD6.4@80.35,122.5 80.525,122.5 80.625,122.4 80.911,122.4 81.526,121.785 81.526,121.409 81.876,121.059 R27.2@82.171,121.059
NetR28_2: R28.2 VD7.4 | length 2.4
  Bottom Layer, Bottom w0.381: VD7.4@80.35,95 81.417,95 81.596,94.821 81.596,94.406 81.944,94.059 R28.2@82.071,94.059
NetR29_2: R29.2 VD8.4 | length 2.1
  Bottom Layer, Bottom w0.381: VD8.4@80.35,69 81.956,69 R29.2@82.298,68.659
NetR57_1: R100.1 X2.16 X2.34 | length 18.5
  Top Layer, TOP w1.5: R100.1@144.35,123.15 144.475,123.275 146.825,123.275 149.09,125.54 149.09,126.76 X2.16@151.49,129.159
  Bottom Layer, Bottom w1.5: X2.16@151.49,129.159 X2.34@159.69,129.159
NetR64_1: R64.1 X2.15 X2.33 | length 38.4
  Bottom Layer, Bottom w1.016: R64.1@136.768,132.659 139.191,132.659 140.75,131.1 140.75,118.895 141.345,118.3 145.631,118.3 X2.15@151.49,124.159
  Bottom Layer, Bottom w1.5: X2.15@151.49,124.159 X2.33@159.69,124.159
NetR68_1: R68.1 X2.14 X2.32 | length 34.2
  Bottom Layer, Bottom w1: R68.1@136.768,126.584 138.556,126.584 139.142,125.998 139.142,116.511 139.728,115.925 148.256,115.925 X2.14@151.49,119.159
  Bottom Layer, Bottom w1.5: X2.14@151.49,119.159 X2.32@159.69,119.159
NetR75_2: R75.2 XS1.11 | length 18.1
  Top Layer, TOP w0.381: v1(65.9,127.675) 79.037,127.675 80.355,128.993 XS1.11@80.355,129.281
  Bottom Layer, Bottom w0.381: R75.2@64.875,125.509 65.175,125.509 65.485,125.819 65.485,126.118 65.875,126.509 65.875,127.65 v1(65.9,127.675)
NetR77_2: R77.2 XS1.17 | length 9.6
  Bottom Layer, Bottom w0.381: XS1.17@87.975,129.281 87.975,129.075 89.425,127.625 94.875,127.625 95.475,128.225 95.475,129.299 R77.2@95.465,129.309
NetR79_2: R79.2 XS1.19 | length 2.4
  Bottom Layer, Bottom w0.381: XS1.19@90.515,129.281 90.529,129.295 92.876,129.295 R79.2@92.89,129.309
NetR81_2: 
NetR82_2: 
Netral: L3.3 pad.7@146,135 pad.7@157.5,145 R101.1 X2.17 X2.35 | length 43.3
  Top Layer, TOP w1.016: L3.3@149.225,149.35 153.15,149.35 pad.7@157.5,145
  Top Layer, TOP w1.5: X2.17@151.481,134.167 X2.17@151.49,134.159
  Bottom Layer, Bottom w1: R101.1@138.1,144.325 138.775,145 pad.7@157.5,145
  Bottom Layer, Bottom w1.016: L3.3@149.225,149.35 L3.3@149.229,149.346
  Bottom Layer, Bottom w1.5: pad.7@146.55,135 147.383,134.167 151.481,134.167 X2.17@151.49,134.159 X2.35@159.69,134.159
NetSv1: C60.1 DD16.2 R80.2 R84.2 | length 8.4
  Bottom Layer, Bottom w0.381: R80.2@124.621,48.1 124.65,48.129 124.65,49.2 124.891,49.441 R84.2@124.891,50.6 124.809,50.682 C60.1@124.809,53.05 124.85,53.091 DD16.2@124.85,56.3
NetSv2: C60.2 DD16.1 R83.2 R84.1 | length 8.6
  Bottom Layer, Bottom w0.381: DD16.1@127.39,56.3 127.39,54.665 126.975,54.25 126.975,53.057 C60.2@126.968,53.05 127.05,52.968 R84.1@127.05,50.6 127.224,50.426 127.224,49.526 127.475,49.275 R83.2@127.475,48.104
NewNetofsig: 
OPT1: R53.2 VD12.2 | length 4.3
  Top Layer, TOP w0.5: R53.2@69.787,94.711 R53.2@69.79,94.709
  Top Layer, TOP w0.508: VD12.2@65.527,94.561 R53.2@69.787,94.561
OPT2: R55.2 VD13.2 | length 4.2
  Top Layer, TOP w0.508: VD13.2@65.837,120.476 R55.2@70.073,120.476
OPT3: R61.2 VD14.2 | length 4.2
  Top Layer, TOP w0.5: VD14.2@65.605,68.824 VD14.2@65.61,68.818 ; R61.2@69.839,68.818 R61.2@69.845,68.813
  Top Layer, TOP w0.508: VD14.2@65.61,68.818 R61.2@69.839,68.818
OSC_IN: DD1.12 DD5.3 | length 18.2
  Top Layer, TOP w0.279: DD1.12@91.37,93.611 92.661,93.611 92.825,93.447 92.825,91.15 93.825,90.15 v1(93.825,90.125)
  Bottom Layer, Bottom w0.381: DD5.3@87.62,81.334 88.915,81.334 90.681,83.1 92.152,83.1 92.375,83.323 92.375,88.65 v1@93.838,90.113
OSC_IN32: DD1.8 ZQ1.2 ZQ1.2_1 | length 15.4
  Top Layer, TOP w0.279: DD1.8@91.37,95.611 92.736,95.611 v1@93.15,96.025
  Bottom Layer, Bottom w0.381: ZQ1.2_1@87.14,107.122 87.14,105.859 90.442,102.557 ZQ1.2@90.442,101.534 90.442,98.933 93.15,96.225 v1(93.15,96.15)
OSC_OUT32: DD1.9 ZQ1.1 | length 14.1
  Top Layer, TOP w0.279: DD1.9@91.37,95.111 94.109,95.111 94.265,94.955 v1(94.455,94.955)
  Bottom Layer, Bottom w0.3: ZQ1.1@87.14,101.534 87.14,100.06 92.245,94.955 v1(94.455,94.955)
Pluse: BAT1.Plus VD11.1 | length 3
  Bottom Layer, Bottom w0.5: VD11.1@86.771,74.339 86.774,74.336 89.787,74.336 BAT1.Plus@89.789,74.334
RX: DD1.93 DD18.3 R106.1 | length 36.4
  Top Layer, TOP w0.279: DD1.93@96.55,100.791 96.55,96.073 v1(98.315,94.309)
  Top Layer, TOP w0.381: v1(98,69.325) 99.975,69.325 DD18.3@100,69.35
  Bottom Layer, Bottom w0.381: R106.1@97.734,84.75 99.075,84.75 99.1,84.725 ; v1(98,69.325) 98,71.475 99.1,72.575 99.1,84.725 ; v1(98.315,94.309) 98.315,94.287 98.825,93.776 98.825,89.01 99.1,88.735 99.1,84.725
RX_ISO: DD18.2 DD21.1 | length 6.8
  Top Layer, TOP w0.6: DD18.2@102.54,63 102.54,61.11 103.175,60.475 v1(104.225,60.475)
  Bottom Layer, Bottom w0.6: DD21.1@101.6,59.59 103.34,59.59 v1(104.225,60.475)
SCLK: DD1.95 DD4.6 R42.1 | length 23.8
  Top Layer, TOP w0.279: DD1.95@95.55,100.791 95.55,102.484 95.989,102.923 101.824,102.923 104.894,105.993 104.894,108.084 105.269,108.459 106.58,108.459 R42.1@106.614,108.425
  Top Layer, TOP w0.381: R42.1@106.614,108.425 106.614,107.159 107.848,105.925 109.45,105.925 110.394,106.869 DD4.6@110.394,108.217
SDA: DD1.96 DD4.5 R43.1 | length 27
  Top Layer, TOP w0.279: DD1.96@95.05,100.791 95.05,103.194 95.465,103.609 101.54,103.609 102.841,104.911 102.841,109.116 105.659,111.934 106.39,111.934 106.614,112.159 R43.1@106.614,113.009
  Top Layer, TOP w0.381: R43.1@106.614,113.009 106.914,113.009 109.125,110.798 DD4.5@109.125,108.218
Test_Sig: C36.2 C68.1 C69.1 DD1.32 R93.1 R97.2 | length 53.1
  Top Layer, TOP w0.279: v1(95.275,70.775) 93.05,73 93.05,81.325 96.05,84.325 DD1.32@96.05,85.431
  Top Layer, TOP w0.381: v1(97.75,73) 99.125,74.375 109.427,74.375 v1@110.75,75.698
  Bottom Layer, Bottom w0.381: v1(95.275,70.775) 95.4,70.775 97.625,73 v1(97.75,73) ; C68.1@107.225,84.366 107.225,83.575 107.45,83.35 R93.1@109.7,83.35 109.7,82.05 110.246,81.504 ; C69.1@107.75,80.125 107.755,80.129 110.246,80.129 110.246,81.504 ; v1(110.755,75.704) 111.879,75.704 112.6,76.425 v1(112.6,80.1) 112.6,81.225 112.321,81.504 110.246,81.504
TX: DD1.92 DD20.2 | length 38.4
  Top Layer, TOP w0.279: DD1.92@97.05,100.791 97.05,97.65 100.225,94.475 100.806,94.475 101.397,93.884 v1(101.515,93.884)
  Bottom Layer, Bottom w0.381: v1(101.515,93.884) 100.881,93.25 100.881,89.729 101.062,89.548 101.062,81.363 101.75,80.675 104.932,80.675 105.155,80.452 105.155,79.12 106.36,77.915 106.36,77.14 107.725,75.775 107.725,74.875 109.54,73.06 DD20.2@109.54,70.4
TX_ISO: DD20.3 DD21.4 R102.1 | length 13.7
  Bottom Layer, Bottom w0.6: DD21.4@101.6,55.78 106.995,55.78 R102.1@107,55.775 DD20.3@107,64.05
Y1: DD6.11 K1.2 | length 21.6
  Top Layer, TOP w0.381: v1(126.49,110.119) K1.2@127.99,110.119
  Bottom Layer, Bottom w0.381: DD6.11@121.165,94.879 122.835,94.879 123.65,95.694 123.65,99.65 124.6,100.6 124.6,106.7 123.65,107.65 123.65,108.715 125.054,110.119 v1(126.49,110.119)
Y2: DD6.12 K2.2 | length 12.6
  Top Layer, TOP w0.381: v1(126.49,101.119) K2.2@127.99,101.119
  Bottom Layer, Bottom w0.381: DD6.12@121.165,93.609 123.459,93.609 124.665,94.815 124.665,99.277 126.49,101.102 v1(126.49,101.119)
Y3: DD6.13 K3.2 | length 7.3
  Top Layer, TOP w0.381: v1(126.49,91.119) K3.2@127.99,91.119
  Bottom Layer, Bottom w0.381: DD6.13@121.165,92.339 125.27,92.339 v1(126.49,91.119)
Y4: DD6.14 K4.2 | length 15
  Top Layer, TOP w0.381: v1(126.49,81.119) K4.2@127.99,81.119
  Bottom Layer, Bottom w0.381: DD6.14@121.165,91.069 121.324,90.909 123.616,90.909 124.85,89.675 124.85,82.758 v1(126.49,81.119)
Y5: DD6.15 K5.1 | length 37
  Bottom Layer, Bottom w0.381: K5.1@118.99,58.034 121.034,58.034 122.45,59.45 122.45,70.725 v1(123.775,72.05) 123.864,72.139 123.864,88.686 122.763,89.787 121.176,89.787 DD6.15@121.165,89.799
Y6: DD6.16 K6.1 | length 49.6
  Top Layer, TOP w0.381: v1(117.686,69.295) 119.455,69.295 121.85,66.9 121.85,47.519 K6.1@118.99,44.659
  Bottom Layer, Bottom w0.381: 117.65,72.05 119.324,73.724 119.324,86.688 120.466,87.831 120.466,88.369 120.626,88.529 DD6.16@121.165,88.529 ; v1@117.675,69.284 117.675,72.05
pads on no net: DD1.13 DD1.16 DD1.24 DD1.25 DD1.30 DD1.31 DD1.33 DD1.34 DD1.35 DD1.36 DD1.42 DD1.43 DD1.44 DD1.45 DD1.46 DD1.47 DD1.48 DD1.51 DD1.52 DD1.53 DD1.54 DD1.55 DD1.56 DD1.57 DD1.58 DD1.59 DD1.60 DD1.69 DD1.70 DD1.71 DD1.73 DD1.78 DD1.79 DD1.80 DD1.81 DD1.82 DD1.83 DD1.84 DD1.85 DD1.86 DD1.87 DD1.88 DD2.8 DD2.9 DD2.10 DD2.11 DD2.12 DD2.13 DD5.1 DD6.7 DD6.10 DD11.4 DD11.5 DD11.8 DD15.8 DD15.9 DD15.10 ZQ1.3

## Polygon pours and split planes (outlines as drawn)
+5V_ISO on Mid-Layer 1, INT1 "+5V_ISO" (solid, pour order 13): 116.028,45.6 96.85,45.6 cw(c96.85,50.15) 92.3,50.15 92.3,59.675 cw(c92.675,59.675) 92.675,60.05 ccw(c92.675,62.3) 94.925,62.3 cw(c95.783,62.3) 95.227,62.954 cw(c98.546,59.054) 98.546,64.175 105.55,64.175 cw(c105.55,60.483) 109.242,60.483 109.242,59.208 ccw(c114.225,59.208) 114.225,54.225 cw(c114.225,52.95) 115.5,52.95 cw(c93.104,46.097) 116.525,46.097 cw(c116.028,46.097)
+3.3VA on Mid-Layer 1, INT1 "+3.3VANAL" (solid, pour order 11): 59.873,130.25 cw(c59.873,128.598) 61.525,128.598 61.525,112.45 ccw(c64.15,112.45) 64.15,109.825 65.875,109.825 cw(c65.875,105.525) 70.175,105.525 70.175,48.27 ccw(c73.195,48.27) 73.195,45.25 84.383,45.25 ccw(c84.383,47.402) 86.534,47.419 86.518,49.491 ccw(c84.467,49.475) 84.467,51.525 80.725,51.525 cw(c80.725,53.15) 79.1,53.15 79.1,54.275 cw(c81.025,54.275) 81.025,56.2 86.309,56.2 cw(c86.309,53.073) 89.436,53.01 89.265,44.509 cw(c85.941,44.575) 85.941,41.25 62.642,41.25 62.642,94.605 57.503,101.778 57.503,127.877 cw(c59.873,127.879)
+5V on Mid-Layer 1, INT1 "Mid-Layer 1, INT1-+5V" (solid, pour order 3): 93.319,138.748 94.757,130.797 ccw(c98.198,131.419) 97.648,127.966 107.201,127.966 cw(c107.201,124.851) 110.062,126.086 111.7,121.625 117.444,115.5 cw(c107.791,106.447) 120.948,107.873 124.675,90.119 124.675,82.784 cw(c122.288,84.07) 122.288,81.359 ccw(c122.287,31.451) 91.267,70.548 83.344,64.262 ccw(c88.076,58.296) 80.462,58.296 ccw(c81.77,58.173) 81.77,56.859 83.943,56.859 ccw(c83.943,59.369) 86.297,58.496 88.99,65.759 90.29,67.059 98.975,67.059 98.975,67.669 111.979,67.669 cw(c111.979,64.926) 114.458,63.752 112.682,60 ccw(c115.008,58.899) 115.008,56.325 cw(c115.008,54.929) 116.404,54.95 116.441,52.426 ccw(c119.372,53.26) 120.253,50.343 ccw(c116.044,64.266) 130.59,64.267 130.59,114.284 ccw(c129.149,114.285) 129.151,115.726 122.756,115.744 cw(c122.758,116.701) 121.801,116.695 121.79,118.377 121.772,120.995 ccw(c106.615,120.897) 117.74,131.192 ccw(c93.361,108.654) 104.978,139.756 cw(c106.634,144.188) 102.583,141.743 95.836,152.923 ccw(c81.352,144.183) 81.35,161.1 68.775,161.1 ccw(c68.772,159.42) 67.093,159.418 cw(c63.415,159.415) 63.412,155.737 59.912,155.737 ccw(c59.91,153.688) 57.86,153.685 57.86,151.987 ccw(c62.546,151.986) 62.547,147.3 85.569,147.3 cw(c85.57,141.425) 89.693,145.611 cw(c80.697,136.468)
+3.3V on Mid-Layer 1, INT1 "Mid-Layer 1, INT1-+3.3V 1" (solid, pour order 2): 77.789,119.535 77.79,74.569 ccw(c84.995,74.569) 81.075,68.523 ccw(c83.817,72.751) 87.012,68.854 91.169,72.261 cw(c118.859,38.478) 118.859,82.159 ccw(c118.859,86.453) 123.153,86.453 ccw(c101.042,86.453) 122.369,92.291 117.102,111.532 ccw(c113.645,110.82) 113.645,114.35 113.426,114.35 cw(c113.426,119.075) 108.701,119.075 108.701,125.367 ccw(c108.298,125.367) 108.341,125.767 ccw(c105.785,102.055) 97.938,124.577 96.658,123.577 cw(c93.787,127.25) 89.125,127.25 ccw(c71.074,127.25) 71.074,145.301 ccw(c71.073,139.078) 64.85,139.078 64.85,128.272 64.85,126.825 ccw(c70.35,126.825) 70.35,121.325 76,121.325 cw(c76,119.536)
+1.65V on Mid-Layer 1, INT1 "Mid-Layer 1, INT1-+1.65V" (solid, pour order 4): 82.784,45.959 78.845,45.959 cw(c78.845,52.709) 72.096,52.68 71.837,113.971 cw(c74.784,113.983) 75.041,116.919 cw(c75.041,116.007) 75.953,116.018 76.35,83.875 76.728,53.26 ccw(c80.497,53.307) 80.584,49.538 81.489,49.559 82.766,49.559 cw(c82.766,47.75) 84.575,47.75 cw(c82.784,47.75)
+3.3VA on Mid-Layer 1, INT1 "+3.3VANAL" (solid, pour order 10): 59.675,130.05
GND_ISO on Mid-Layer 2, INT2 "+5C_ISO" (solid, pour order 14): 116.175,45.625 cw(c116.111,45.689) 116.111,45.599 97.076,45.599 cw(c97.076,51.075) 91.6,51.075 91.6,58.825 cw(c93.325,58.825) 93.325,60.55 ccw(c93.325,62.85) 95.625,62.85 cw(c96.666,62.85) 96.65,63.89 107.178,64.049 cw(c107.24,59.92) 110.16,62.84 cw(c107.469,60.149) 111.275,60.149 111.275,57.825 ccw(c115.5,57.825) 115.5,53.6 cw(c115.5,52.879) 116.22,52.875
GNDA on Mid-Layer 2, INT2 "GNDANAL" (solid, pour order 12): 60.25,130.85 60.25,42.45 61.65,41.05 87.125,41.05 ccw(c87.125,43.875) 89.95,43.875 89.95,50.825 ccw(c85.075,50.825) 85.075,55.7 80.775,55.7 cw(c80.775,57.175) 79.3,57.175 79.3,92.525 ccw(c48.78,92.525) 78.126,100.911 ccw(c66.175,97.497) 66.175,109.925 66.175,130.825 ccw(c63.2,130.825) 63.2,133.8 ccw(c63.2,130.85)
GND on Mid-Layer 2, INT2 "Mid-Layer 2, INT2-GND 1" (solid, pour order 6): 68.85,139.961 cw(c67.975,150.741) 57.52,153.509 cw(c60.96,152.598) 60.968,156.156 ccw(c60.983,163.004) 64.886,157.377 cw(c78.441,137.833) 80.234,161.55 83.075,161.55 cw(c83.075,152.826) 91.8,152.825 91.8,147.881 ccw(c97.134,147.881) 96.251,142.621 119.527,138.714 cw(c119.118,136.277) 121.59,136.276 121.59,117.759 ccw(c123.778,117.858) 123.778,115.667 127.516,115.667 cw(c127.516,112.13) 131.054,112.112 130.784,55.899 cw(c123.191,57.491) 121.59,49.9 cw(c121.962,55.47) 116.427,54.739 cw(c116.723,58.803) 112.791,59.87 114.254,65.261 ccw(c112.93,65.62) 113.555,66.841 ccw(c109.752,59.403) 109.425,67.75 107.375,67.75 98.89,67.75 98.89,66.759 93.89,66.759 89.49,66.759 89.403,66.751 89.319,66.729 89.24,66.692 89.168,66.642 89.107,66.58 89.057,66.509 89.02,66.43 88.997,66.346 88.99,66.259 89.02,60.071 cw(c85.492,60.294) 85.49,56.759 81.19,56.759 81.017,56.931 80.877,57.131 80.774,57.352 80.711,57.588 80.69,57.831 80.69,109.359 80.682,109.446 80.659,109.53 80.623,109.609 80.573,109.68 80.511,109.742 80.44,109.792 80.361,109.829 80.277,109.851 80.19,109.859 cw(c80.19,121.198) 68.85,121.199
GND_24V on Mid-Layer 2, INT2 "GND_24V_L03_P008" (solid, pour order 8): 122.4,120.853 cw(c136.79,115.845) 138.365,131 cw(c138.22,129.61) 139.618,129.61 139.618,124.273 cw(c131.627,124.266) 131.627,116.275 123.461,116.275 cw(c123.461,117.146) 122.595,117.057 cw(c159.525,120.853)
GND on Top Layer, TOP "Top Layer, TOP-GND" (solid, pour order 0): 90.55,97.426 90.55,84.7 103.2,84.7 ccw(c103.2,88.23) 106.73,88.23 106.73,97.594 ccw(c104.252,97.594) 104.253,100.072 93.204,100.078 ccw(c93.202,97.426)
GND on Bottom Layer, Bottom "Bottom Layer, Bottom-GND" (solid, pour order 1): 64.765,118.959 64.813,141.655 cw(c74.838,141.634) 74.838,151.659 cw(c74.838,141.368) 83.663,146.662 ccw(c87.829,149.161) 86.58,144.467 ccw(c136.68,332.737) 119.753,138.651 cw(c119.579,136.648) 121.589,136.648 121.59,117.759 121.59,117.285 ccw(c123.416,117.285) 123.416,115.459 128.848,115.459 cw(c128.848,113.232) 131.076,113.217 130.721,55.785 cw(c124.571,55.822) 124.831,49.677 cw(c123.542,80.035) 123.942,49.652 cw(c123.843,57.105) 116.39,57.105 115.997,66.501 115.997,67.825 98.89,67.6 98.89,66.859 93.89,66.859 89.79,66.859 89.651,66.847 89.516,66.811 89.39,66.752 89.275,66.672 89.177,66.573 89.097,66.459 89.038,66.332 89.002,66.198 88.99,66.059 89,61.859 88.997,60.098 cw(c85.663,60.104) 85.671,56.77 82.09,56.759 81.846,56.78 81.611,56.843 81.39,56.946 81.19,57.086 81.017,57.259 80.877,57.459 80.774,57.68 80.711,57.915 80.69,58.158 80.69,109.359 80.69,118.958

## Keep-outs
Keep-Out Layer, Board:
  the board outline again, w0.254

## Other copper
Multi-Layer:
  pour cut-out: 66.99,45 ccw(c61.99,45) 61.99,50 ccw(c61.99,45) 56.99,45 ccw(c61.99,45) 61.99,40 ccw(c61.99,45)
  pour cut-out: 162.39,45 ccw(c157.39,45) 157.39,50 ccw(c157.39,45) 152.39,45 ccw(c157.39,45) 157.39,40 ccw(c157.39,45)
  pour cut-out: 162.39,161 ccw(c157.39,161) 157.39,166 ccw(c157.39,161) 152.39,161 ccw(c157.39,161) 157.39,156 ccw(c157.39,161)
  pour cut-out: 66.99,161 ccw(c61.99,161) 61.99,166 ccw(c61.99,161) 56.99,161 ccw(c61.99,161) 61.99,156 ccw(c61.99,161)
  pour cut-out: 66.99,99.562 ccw(c61.99,99.562) 61.99,104.562 ccw(c61.99,99.562) 56.99,99.562 ccw(c61.99,99.562) 61.99,94.562 ccw(c61.99,99.562)
  pour cut-out: 66.99,73.759 ccw(c61.99,73.759) 61.99,78.759 ccw(c61.99,73.759) 56.99,73.759 ccw(c61.99,73.759) 61.99,68.759 ccw(c61.99,73.759)

## Silkscreen, mask and mechanical layers (free items; w line width, h text height)
Top Overlay, Top Silk:
  lines w0.254: 146.525,135 146.55,135
  lines w0.5: 146,135 143.6,137.4 143.6,143.225 144.225,143.85 156.35,143.85 157.5,145 ; 146,141.65 146.85,142.5 160.325,142.5 160.325,150.175 157.5,153
  text "K1" at 125.25,110.1 h0.8 r90
  text "K2" at 126.625,99.1 h0.8 r90
  text "ADC1" at 76.841,94.575 h0.8 r90
  text "GND" at 76.866,89.95 h0.8 r90
  text "K5" at 126.666,89.025 h0.8 r90
  text "K4" at 124.65,80.8 h0.8
  text "GND" at 125.65,74.809 h0.8
  text "ADC2" at 74.666,71.975 h0.8 r90
  text "K5" at 124.875,71.809 h0.8
  text "K6" at 118.35,70.484 h0.8
  text "+5V" at 128.175,70.409 h0.8
  text "+1.65V" at 76.966,65.9 h0.8 r90
  text "GND" at 77.016,62.25 h0.8 r90
  text "ADC3" at 78.266,52.2 h0.8 r90
  text "GNDA" at 81.966,42.375 h0.8 r90
  text "+3.3VA" at 75.816,42.1 h0.8 r90
Bottom Overlay, Bot Silk:
  rectangle: 78.975,69.875 79.975,70.875
  rectangle: 79.775,66.225 80.775,67.225
  rectangle: 78.175,66.225 79.175,67.225
  rectangle: 79.775,92.225 80.775,93.225
  rectangle: 78.175,92.225 79.175,93.225
  rectangle: 78.175,119.7 79.175,120.7
  rectangle: 79.775,119.7 80.775,120.7
  rectangle: 78.975,123.35 79.975,124.35
  lines w0.254: 77.675,97.375 77.675,91.725 81.075,91.725 ; 77.675,123.925 77.675,119.2 81.275,119.2 81.275,120.2 ; 78.55,124.85 81.1,124.85 ; 80.35,71.375 77.675,71.375 77.675,65.725 81.198,65.725 ; 81.275,69.577 81.275,70.45
  text "DZ_V5" at 92.021,163.109 h1.67
  text "20.04.21" at 92.596,160.054 h1.67
Mechanical 2, Bot Assy:
  the board outline again, w0.254